# Altium PCB PCB1.PcbDoc
Units mm, origin at the board's own origin, x right, y up, seen from the top; angles counter-clockwise.
Board outline 96.9 x 99.19 mm, 2 copper layers (Top Layer, Bottom Layer); 35 components, 35 nets, 123 pads, 12 vias.
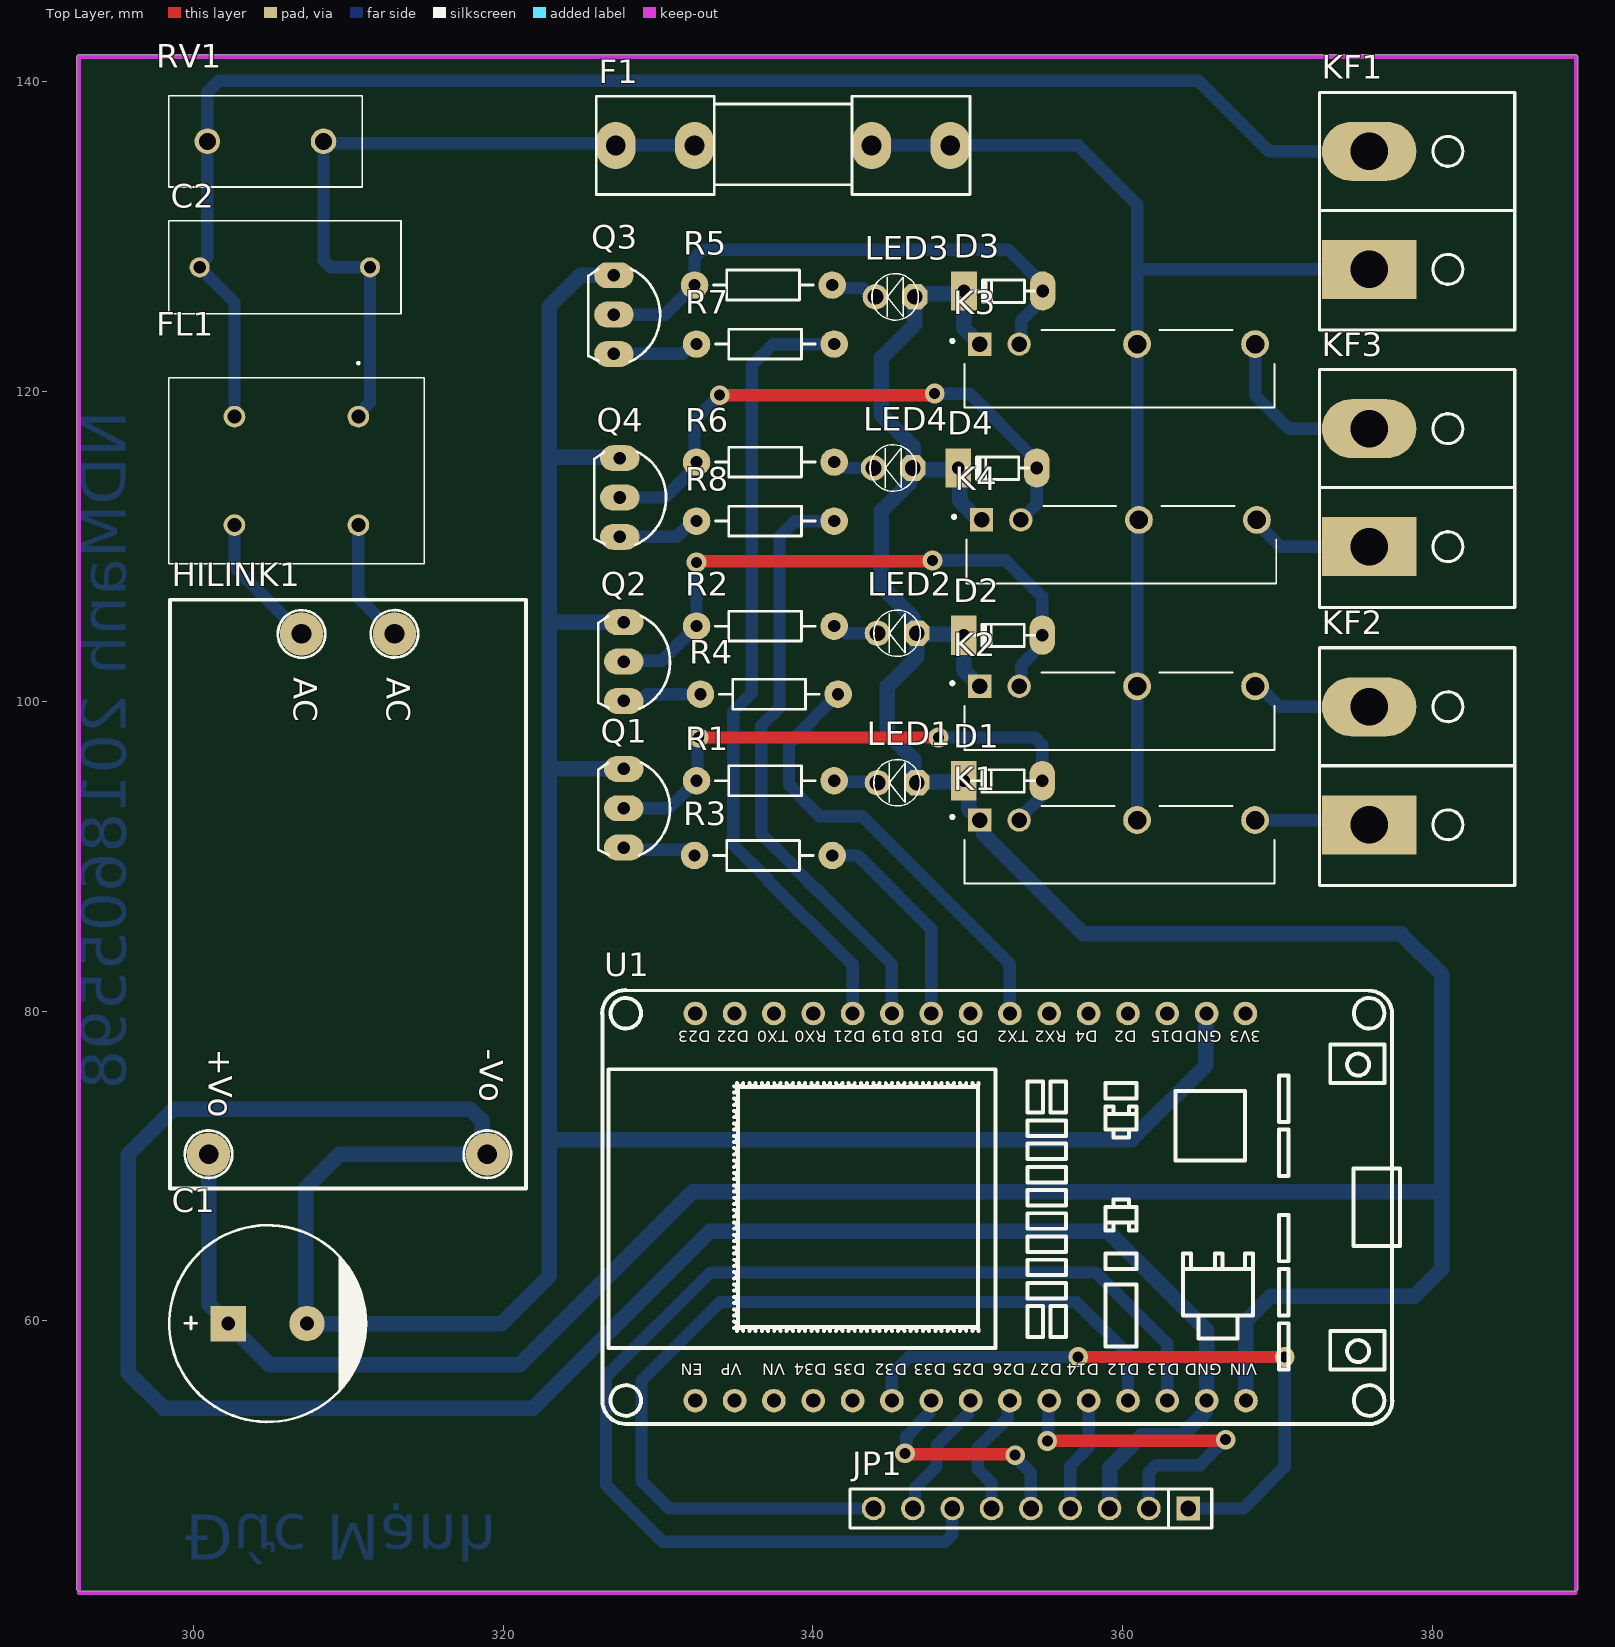
[diagram p0: Top Layer view]
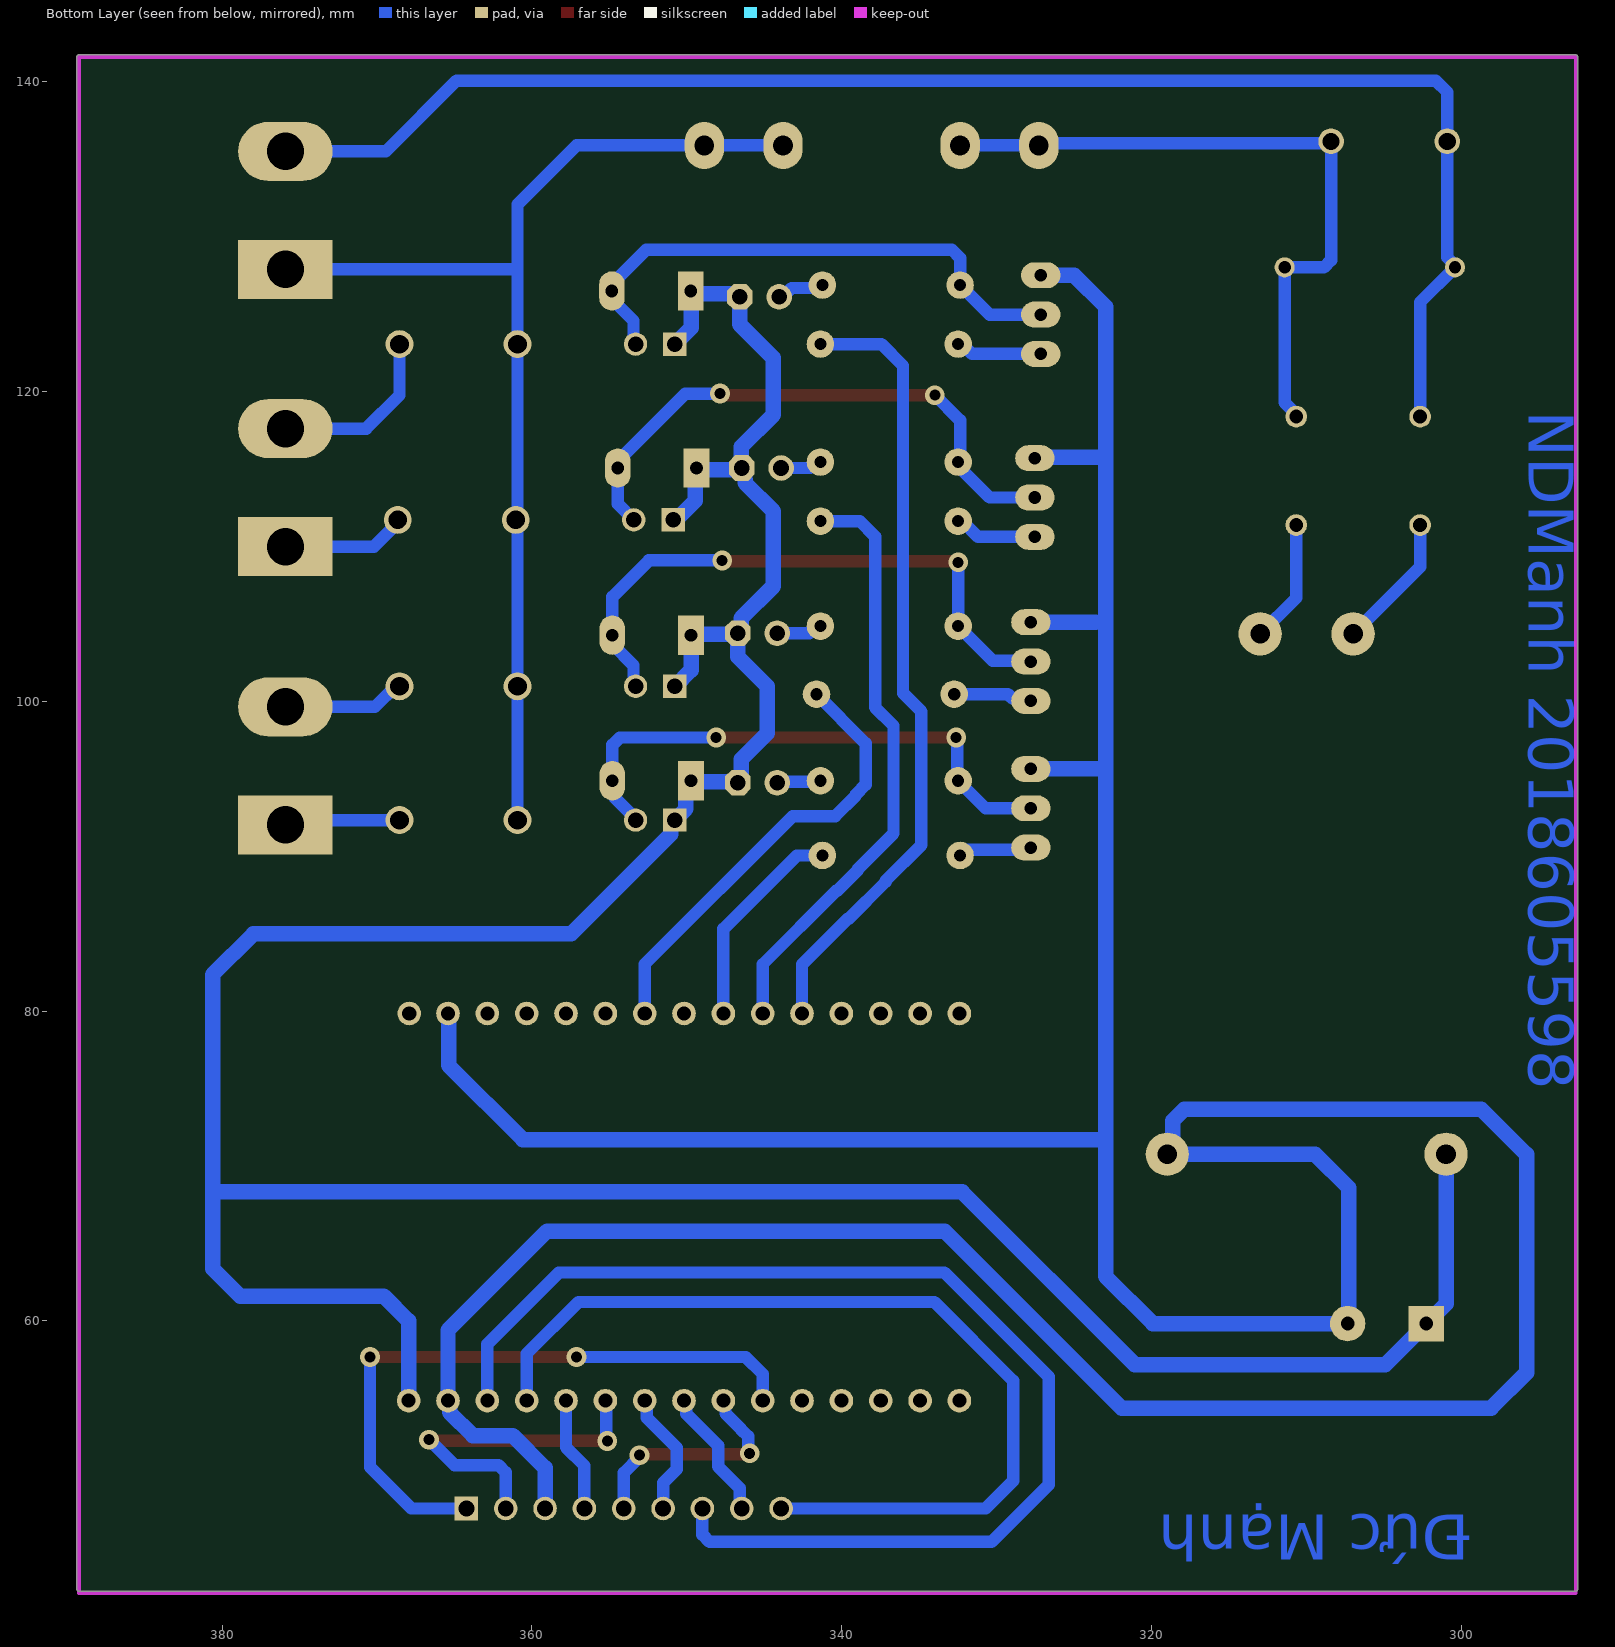
[diagram p1: Bottom Layer view, seen from below]
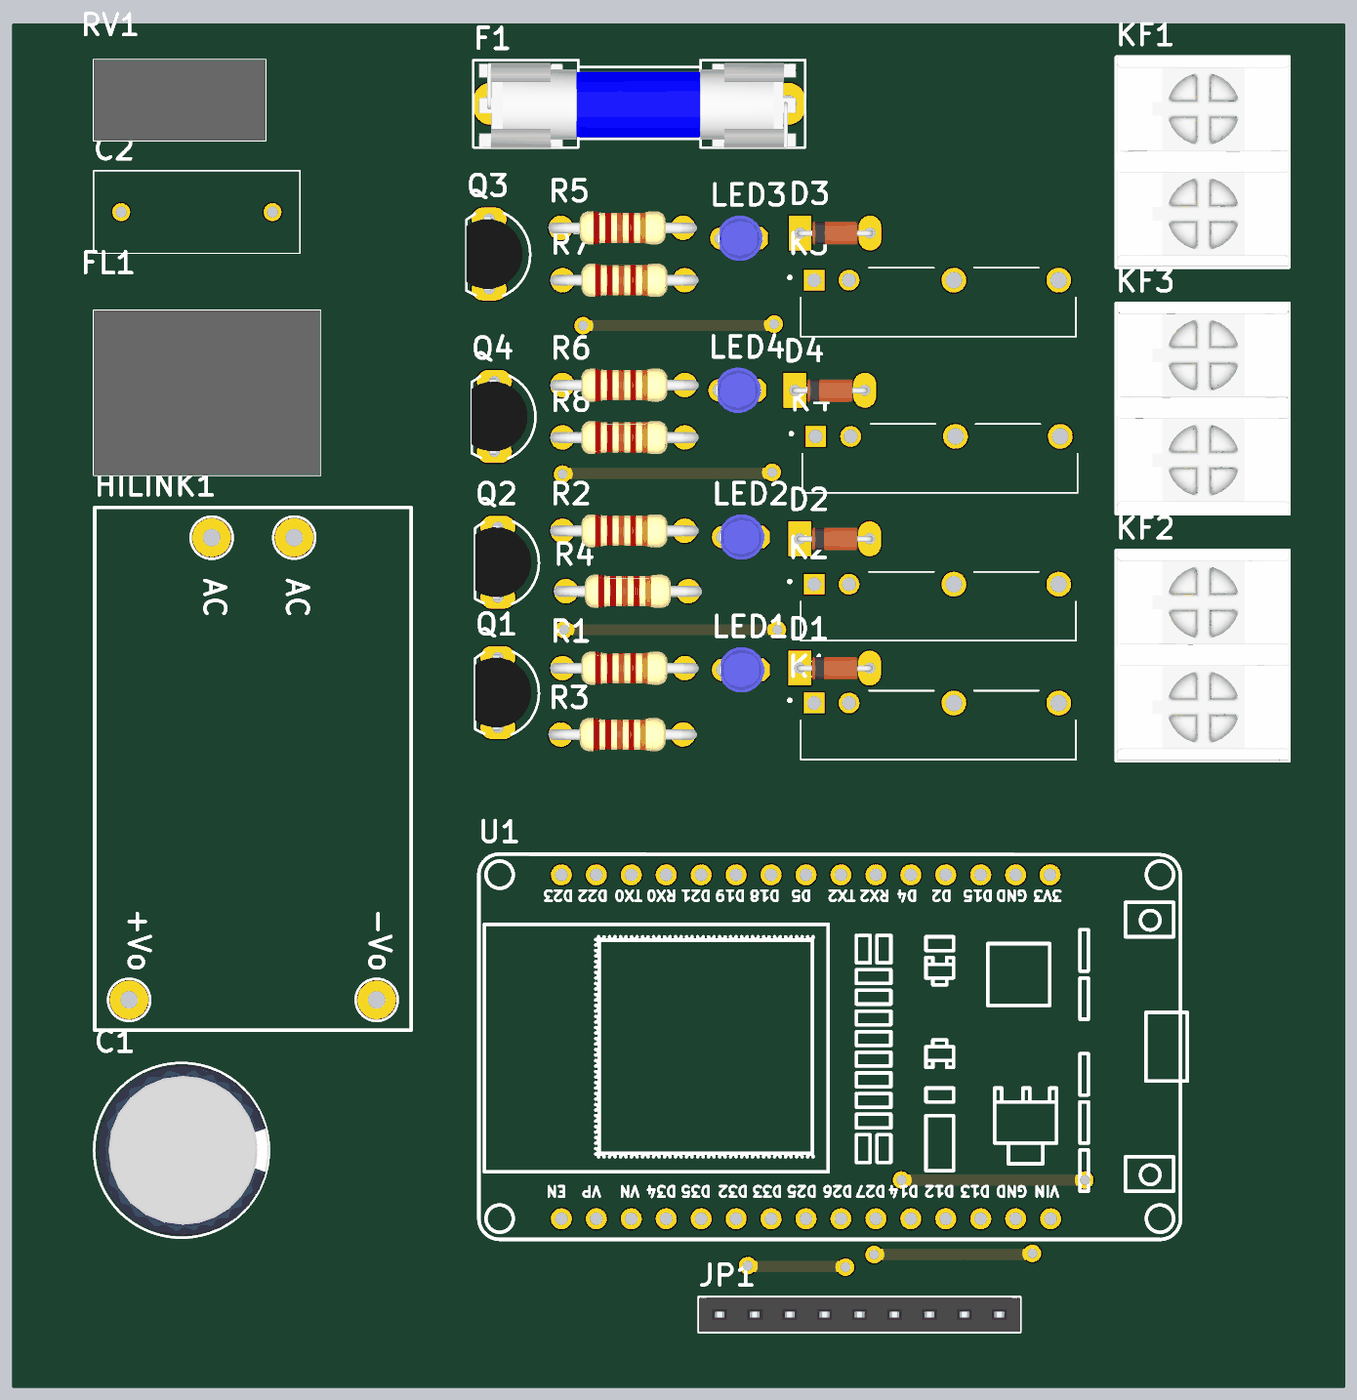
[diagram p2: 3D render of the assembled board from above, using the file's embedded part models]

## Layer stack, top to bottom
Top Solder: solder mask 0.0102, Solder Resist, Dk 3.5
Top Layer: signal copper 0.0356
Dielectric 1: dielectric 0.32, FR-4, Dk 4.8
Bottom Layer: signal copper 0.0356
Bottom Solder: solder mask 0.0102, Solder Resist, Dk 3.5

## Board outline
292.481,42.672 ccw(c292.608,42.672) 292.608,42.545 389.255,42.545 ccw(c389.255,42.672) 389.382,42.672 389.382,141.605 ccw(c389.255,141.605) 389.255,141.732 292.608,141.732 ccw(c292.608,141.605) 292.481,141.605

## Design rules (kind name [scope] priority, off if disabled: settings)
Clearance [All] p1: gap=1 ignorepadtopadclearanceinfootprint=FALSE
PolygonConnect [All] p1: connectstyle=Relief reliefconductorwidth=0.254 reliefentries=4 polygonreliefangle="90 Angle" airgapwidth=0.254
RoutingVias [All] p1: holewidth=0.711 width=1.27 viastyle="Through Hole" minholewidth=0.711 minwidth=1.27 maxholewidth=0.711 maxwidth=1.27
SolderMaskExpansion [All] p1: expansion=0.102 istentingtop=FALSE
Width GND [InNet('GND')] p1: maxlimit=1 minlimit=1 preferedwidth=1
Width VCC [InNet('VCC5')] p2: maxlimit=1 minlimit=1 preferedwidth=1
Width SIGNAL [All] p3: maxlimit=0.8 minlimit=0.8 preferedwidth=0.8
30 further rules are at their usual default settings.

## Components (designator, comment, footprint, x,y, rotation, side; value= is the part's Value field where it differs from the comment)
C1 "Cap Pol3" CP2/5 302.253,59.817 r0 top value=C?
C2 "R46KF3100JMP0K" R46KF3100JMP0K 300.404,128.016 r0 top
D1 "100v" "DIODE 0.5A" 352.271,94.869 r0 top
D2 "100v" "DIODE 0.5A" 352.271,104.267 r0 top
D3 "100v" "DIODE 0.5A" 352.298,126.492 r0 top
D4 "100v" "DIODE 0.5A" 351.917,115.062 r0 top
F1 "F1A" Fuse 338.074,135.89 r180 top value=Fuse
FL1 "UU9.8-10MH" UU9810MH 310.654,118.379 r270 top
HILINK1 "HILINK" HILINK_1W 321.481,93.853 r270 top
JP1 "JP 1x9 2.54" "JP 1x9 CT" 354.076,47.879 r180 top
K1 "HF49FD/005-1H12T" RELAY_HF49FD/005-1H12T 359.804,90.729 r0 top
K2 "HF49FD/005-1H12T" RELAY_HF49FD/005-1H12T 359.804,99.365 r0 top
K3 "HF49FD/005-1H12T" RELAY_HF49FD/005-1H12T 359.804,121.463 r0 top
K4 "HF49FD/005-1H12T" RELAY_HF49FD/005-1H12T 359.918,110.109 r0 top
KF1 "CON 2 KF7.62" "CON 2 KF7.62" 375.92,127.94 r90 top
KF2 "CON 2 KF7.62" "CON 2 KF7.62" 375.92,92.075 r90 top
KF3 "CON 2 KF7.62" "CON 2 KF7.62" 375.92,110.033 r90 top
LED1 "LED 3mm" LED-3MM-BLUE 345.313,94.742 r180 top
LED2 "LED 3mm" LED-3MM-BLUE 345.313,104.394 r180 top
LED3 "LED 3mm" LED-3MM-BLUE 345.186,126.111 r180 top
LED4 "LED 3mm" LED-3MM-BLUE 345.059,115.062 r180 top
Q1 "C1815" C1815_cam 327.787,93.091 r270 top
Q2 "C1815" C1815_cam 327.787,102.564 r270 top
Q3 "C1815" C1815_cam 327.152,124.968 r270 top
Q4 "C1815" C1815_cam 327.533,113.157 r270 top
R1 "510R" R1/4W 341.376,94.869 r180 top value="R1/4W - 1K"
R2 "510R" R1/4W 341.376,104.85 r180 top value="R1/4W - 1K"
R3 "510R" R1/4W 341.249,90.043 r180 top value="R1/4W - 1K"
R4 "510R" R1/4W 341.63,100.457 r180 top value="R1/4W - 1K"
R5 "510R" R1/4W 341.249,126.873 r180 top value="R1/4W - 1K"
R6 "510R" R1/4W 341.376,115.443 r180 top value="R1/4W - 1K"
R7 "510R" R1/4W 341.376,123.063 r180 top value="R1/4W - 1K"
R8 "510R" R1/4W 341.376,111.633 r180 top value="R1/4W - 1K"
RV1 "10D561K" 10D561K 300.904,136.154 r0 top
U1 "ESP32_MODULE copy" ESP32-WIFIMODULE-FOOTPRINT 351.917,69.469 r90 top

## Footprints (in the part's own frame and the unit in brackets; to place one, negate y for a bottom-side part, rotate by r counter-clockwise, add the part's x,y. Pads: shape width x height; smd on the part's side, far side on the other; paste and mask are expansions set on the pad)
10D561K [mm]
  round 1.65 hole 1.1: 1(0,0) 2(7.5,0)
  silkscreen extent -2.5,-2.95 10,2.95, body extent -2.5,-2.95 10,2.95, height 15.6
C1815_cam [mil]
  oval 66x100 hole 32: 1(-100,0) 2(0,0) 3(100,0)
  silkscreen extent -117,-65 120,118, body extent -109,-66 109,95, height 245
"CON 2 KF7.62" [mil]
  rect 150x240 hole 95: 1(-2,0)
  oval 150x240 hole 95: 2(298,0)
  silkscreen extent -157,-370 448,126, body extent -152,-370 448,122, height 493
CP2/5 [mil]
  rect 90x90 hole 35: 1(0,0)
  round 90 hole 35: 2(200,0)
  silkscreen extent -150,-250 350,250, body extent -142,-246 350,246, height 984
"DIODE 0.5A" [mil] "Diode muoi, xung"
  oval 65x100 hole 32: 1(100,0)
  rect 65x100 hole 32: 2(-100,0)
  silkscreen extent -80,-30 80,28, body extent -108,-33 108,32, height 61
ESP32-WIFIMODULE-FOOTPRINT [mil]
  round 60 hole 36: 1(-575.9,768.25) 2(-575.9,668.25) 3(-575.9,568.25) 4(-575.9,468.25) 5(-575.9,368.25) 6(-575.9,268.25) 7(-575.9,168.25) 8(-575.9,68.25) 9(-575.9,-31.75) 10(-575.9,-131.75) 11(-575.9,-231.75) 12(-575.9,-331.75) 13(-575.9,-431.75) 14(-575.9,-531.75) 15(-575.9,-631.75) 16(408.35,-630.18) 17(408.35,-531.75) 18(408.35,-431.75) 19(408.35,-331.75) 20(408.35,-231.75) 21(408.35,-131.75) 22(408.35,-31.75) 23(408.35,68.25) 24(408.35,168.25) 25(408.35,268.25) 26(408.35,368.25) 27(408.35,468.25) 28(408.35,568.25) 29(408.35,668.25) 30(408.35,768.25)
  silkscreen extent -635,-1023 468,1005
Fuse [mil]
  oval 100x120 hole 50: 1(-425,0) 1(-225,0) 2(225,0) 2(425,0)
  silkscreen extent -475,-125 475,125, body extent -448,-117 459,127, height 378
HILINK_1W [mil]
  round 110 hole 50: 1(-413.39,-334.65) 2(-413.39,-570.87) 3(909.45,-98.43) 4(909.45,-807.09)
  silkscreen extent -500,-906 996,0, body extent -505,-911 1001,5
"JP 1x9 CT" [mm] "9 row, straight, gold plating"
  rect 1.52x1.52 hole 1.02: 1(-10.16,0)
  round 1.52 hole 1.02: 2(-7.62,0) 3(-5.08,0) 4(-2.54,0) 5(0,0) 6(2.54,0) 7(5.08,0) 8(7.62,0) 9(10.16,0)
  silkscreen extent -11.68,-1.27 11.68,1.27, body extent -11.68,-1.25 11.68,1.25, height 8.51
LED-3MM-BLUE [mil]
  oct 65x65 hole 40: 1(-55,0)
  round 65 hole 40: 2(45,0)
  silkscreen extent -64,-59 54,59, body extent -72,-65 54,65, height 184
R1/4W [mil]
  round 70 hole 31: 1(0,0) 2(350,0)
  silkscreen extent 48,-38 302,38, body extent -40,-47 386,47, height 111
R46KF3100JMP0K [mm]
  round 1.3 hole 0.8: 1(0,0) 2(11,0)
  silkscreen extent -2,-3 13,3
RELAY_HF49FD/005-1H12T [mm]
  rect 1.508x1.508 hole 1: 1(-9.03,1.6)
  round 1.508 hole 1: 2(-6.49,1.6)
  round 1.8 hole 1.2: 3(1.13,1.6) 4(8.75,1.6)
  silkscreen extent -10.9,-2.5 10,2.5
UU9810MH [mm]
  round 1.4 hole 0.9: 1(0,0) 2(7,0) 3(7,-8) 4(0,-8)
  silkscreen extent -3.5,-12.25 9.5,4.25, body extent -2.5,-12.25 9.5,4.25, height 17.1

## Part data
C1: "Polarized Capacitor (Surface Mount)", LatestRevisionDate=17-Jul-2002, LatestRevisionNote="Re-released for DXP Platform.", PackageReference=C0805, Publisher="Altium Limited"
C2: "Capacitor", Manufacturer_Name=Kemet, Mouser Part Number=80-R46KF3100JMP0K, Datasheet Link=https://api.kemet.com/component-edge/download/specsheet/R46KF3100JMP0K.pdf, Height=12.1mm, Manufacturer_Part_Number=R46KF3100JMP0K, Mouser Price/Stock=https://www.mouser.co.uk/ProductDetail/KEMET/R46KF3100JMP0K/?qs=gt1LBUVyoHk5JqGpZKIGRw%3D%3D
D1 D2 D3 D4: library part "Diode 1N4148", "Cắm", Chung_Loai=Cắm, Don_Vi=Con, Ma_Hang=MH001065, Ten_Linh_Kien="Diode 1N4148 DO35 450mA 100V ( 1N4148 DIP)"
F1: library part Fuse, "Fuse", Designed by=VanDungEvn
FL1: "Filter", Manufacturer_Name="Guangdong Fenghua Advanced Tech", Datasheet Link=https://datasheet.lcsc.com/szlcsc/1811111206_Guangdong-Fenghua-Advanced-Tech-UU9-8-10mH_C148474.pdf, Height=17mm, Manufacturer_Part_Number=UU9.8-10MH
JP1: library part "JP 1x9 2.54 Cai Thang", "Cắm", Chung_Loai=Cắm, Don_Vi=Con, Ma_Hang=MH004006, Ten_Linh_Kien="Jump Đơn Cái 2.54MM 1x20P Thẳng"
K1 K2 K3 K4: "Relay: electromagnetic; SPST-NO; Ucoil: 5VDC; 5A/250VAC; 5A/30VDC", Package=None, Availability=Unavailable, MF=Hongfa, MP=HF49FD/005-1H12T, Price=None, SnapEDA_Link=https://www.snapeda.com/parts/HF49FD/005-1H12T/Hongfa/view-part/2753221/?ref=snap
KF1 KF2 KF3: "Cắm", Chung_Loai=Cắm, Don_Vi=Con, Ma_Hang=MH002053, Ten_Linh_Kien="CON 2 KF7.62-2P 7.62MM (Đen Thẳng)"
LED1 LED2 LED3 LED4: library part "LED 3mm Xanh Duong", "Cắm", Chung_Loai=Cắm, Don_Vi=Con, Ma_Hang=MH009003, Ten_Linh_Kien="LED 3MM Xanh Dương SS (1000c)"
Q1 Q2 Q3 Q4: "NPN 600mW, ECB"
R1 R2 R3 R4 R5 R6 R7 R8: library part R1/4W, "Resistor 1/4W"
RV1: "Varistor", Arrow Part Number=MOV-10D561K, Manufacturer_Name=Bourns, Mouser Part Number=652-MOV-10D561K, Arrow Price/Stock=https://www.arrow.com/en/products/mov-10d561k/bourns, Datasheet Link=https://www.bourns.com/docs/Product-Datasheets/MOV10D.pdf, Height=15.5mm, Manufacturer_Part_Number=MOV-10D561K, Mouser Price/Stock=https://www.mouser.co.uk/ProductDetail/Bourns/MOV-10D561K?qs=lgttKnAd%252B2ArrqGQgWwr6w%3D%3D

## Via types
v1: diameter 1.27, hole 0.711, Top Layer to Bottom Layer, 12 vias

## Nets (pads, with @x,y where several pads share a name; then routed paths per layer and width w, separated by ;. In a path a pad name is that pad's centre, name@x,y a point inside that pad or via, vN(x,y) a via of type N, cw(c..) or ccw(c..) an arc to the next point about the centre after c; other vN are vias at no path point)
0V~F1: FL1.3 HILINK1.2 | length 8.8
  Bottom Layer w0.8: FL1.3 302.654,108.68 HILINK1.2
220V~F: C2.2 F1.2 FL1.1 RV1.2 | length 44.9
  Bottom Layer w0.8: FL1.1 310.654,118.541 311.404,119.291 C2.2 308.873,128.016 308.404,128.485 RV1.2 308.536,136.022 327.147,136.022 327.279,135.89 F1.2@332.359,135.89
220V~F1: FL1.2 HILINK1.1 | length 8
  Bottom Layer w0.8: FL1.2 310.654,106.68 HILINK1.1
GND: C1.2 HILINK1.3 JP1.3 Q1.1 Q2.1 Q3.1 Q4.1 U1.14 U1.17 | length 302.6
  Bottom Layer w1: 323.596,105.104 Q2.1 ; Q3.1@327.658,127.506 324.991,127.506 322.966,125.481 322.966,115.751 ; Q4.1@327.733,115.751 322.966,115.751 ; Q1.1 323.215,95.631 322.966,95.88 ; JP1.3 359.156,50.494 361.241,52.579 363.82,52.579 365.323,54.082 365.323,54.741 U1.14 365.423,59.392 359.029,65.786 333.355,65.786 321.925,54.356 315.341,54.356 298.069,54.356 295.783,56.642 295.783,70.739 298.694,73.65 317.891,73.65 318.638,72.903 318.638,71.096 HILINK1.3 309.437,70.753 307.257,68.573 307.257,59.892 C1.2 319.913,59.817 322.966,62.87 322.966,71.379 ; U1.17 365.379,79.797 365.379,76.487 360.584,71.693 323.28,71.693 322.966,71.379 ; 322.966,71.379 322.966,95.88 ; 322.966,95.88 322.966,115.751
L: F1.1 K1.3 K2.3 K3.3 K4.3 KF1.1 | length 73.5
  Bottom Layer w0.8: F1.1@343.789,135.89 348.869,135.89 357.124,135.89 360.934,132.08 360.934,127.889 ; K1.3 K2.3 360.934,111.633 360.934,127.889 ; KF1.1 360.934,127.889
L1: K2.4 KF2.2 | length 7.9
  Bottom Layer w0.8: K2.4 368.825,100.965 370.145,99.644 KF2.2
L2: K1.4 KF2.1 | length 7.5
  Bottom Layer w0.8: K1.4 375.615,92.329 KF2.1
L3: K4.4 KF3.1 | length 8
  Bottom Layer w0.8: K4.4@368.554,111.633 370.205,109.982 KF3.1
L4: K3.4 KF3.2 | length 11.6
  Bottom Layer w0.8: K3.4 368.554,119.761 370.713,117.602 KF3.2
LED_1: JP1.6 U1.9 | length 8.2
  Bottom Layer w0.8: JP1.6 351.536,49.53 350.647,50.419 350.647,51.788 352.585,53.726 352.585,54.702 U1.9
LED_2: JP1.8 U1.8 | length 8.5
  Bottom Layer w0.8: JP1.8 346.594,48.017 346.594,49.203 347.98,50.589 347.98,51.943 350.045,54.008 350.045,54.702 U1.8
LED_3: JP1.5 U1.7 | length 15.1
  Top Layer w0.8: v1(345.945,51.435) 346.001,51.379 353.002,51.379 v1(353.059,51.322)
  Bottom Layer w0.8: v1(345.945,51.435) 346.035,51.525 346.035,52.532 346.525,53.023 346.525,53.034 347.505,54.014 347.505,54.702 U1.7 ; v1(353.059,51.322) 353.059,51.195 354.076,50.178 JP1.5
LED_4: JP1.1 U1.6 | length 42
  Top Layer w0.8: v1(357.124,57.658) v1(370.459,57.658)
  Bottom Layer w0.8: U1.6 345.103,56.559 346.202,57.658 v1(357.124,57.658) ; JP1.1 367.792,47.879 370.459,50.546 v1(370.459,57.658)
N: C2.1 FL1.4 KF1.2 RV1.1 | length 99.3
  Bottom Layer w0.8: FL1.4 302.654,125.766 C2.1 300.404,128.151 300.904,128.651 RV1.1 300.904,139.333 301.649,140.078 364.871,140.078 369.44,135.509 KF1.2
NetD1_1: D1.1 K1.2 Q1.2 R1.2 | length 36.2
  Top Layer w0.8: v1(332.613,97.663) v1(348.107,97.663)
  Bottom Layer w0.8: Q1.2 330.708,93.091 R1.2 332.549,94.932 332.549,97.599 v1(332.613,97.663) ; v1(348.107,97.663) 354.33,97.663 354.811,97.182 D1.1 354.648,94.706 354.648,93.758 353.314,92.424 K1.2
NetD2_1: D2.1 K2.2 Q2.2 R2.2 | length 39.5
  Top Layer w0.8: v1(332.486,108.966) 332.549,109.029 347.662,109.029 v1(347.726,109.093)
  Bottom Layer w0.8: Q2.2 327.844,102.621 330.257,102.621 R2.2 v1(332.486,108.966) ; v1(347.726,109.093) 352.455,109.093 354.811,106.737 354.811,103.681 353.449,102.32 353.449,101.1 K2.2
NetD3_1: D3.1 K3.2 Q3.2 R5.2 | length 35.9
  Bottom Layer w0.8: Q3.2 330.454,124.968 R5.2 332.359,128.623 332.898,129.162 352.612,129.162 354.838,126.936 D3.1 354.838,125.96 353.449,124.572 353.449,123.198 K3.2
NetD4_1: D4.1 K4.2 Q4.2 R6.2 | length 37.5
  Top Layer w0.8: v1(333.985,119.761) 347.472,119.761 347.496,119.786 347.776,119.786 v1(347.866,119.875)
  Bottom Layer w0.8: Q4.2 330.454,113.157 332.359,115.062 332.359,118.135 v1(333.985,119.761) ; v1(347.866,119.875) 347.878,119.863 350.101,119.863 354.457,115.506 354.457,112.738 K4.2
NetLED1_2: LED1.2 R1.1 | length 2.8
  Bottom Layer w0.8: R1.1 341.435,94.81 344.102,94.81 LED1.2
NetLED2_2: LED2.2 R2.1 | length 3
  Bottom Layer w0.8: R2.1 341.641,104.85 342.097,104.394 LED2.2
NetLED3_2: LED3.2 R5.1 | length 3.1
  Bottom Layer w0.8: R5.1 341.436,126.686 343.238,126.686 343.813,126.111 LED3.2
NetLED4_2: LED4.2 R6.1 | length 2.7
  Bottom Layer w0.8: R6.1 341.641,115.443 342.022,115.062 LED4.2
NetQ1_3: Q1.3 R3.2 | length 4.8
  Bottom Layer w0.8: Q1.3 327.914,90.424 332.359,90.424 R3.2@332.486,90.297
NetQ2_3: Q2.3 R4.2 | length 5.1
  Bottom Layer w0.8: Q2.3 327.955,100.192 328.992,100.192 329.126,100.326 329.146,100.326 329.277,100.457 R4.2
NetQ3_3: Q3.3 R7.2 | length 5.6
  Bottom Layer w0.8: Q3.3 331.586,122.428 332.221,123.063 R7.2
NetQ4_3: Q4.3 R8.2 | length 5.1
  Bottom Layer w0.8: Q4.3@327.787,110.617 331.205,110.617 332.221,111.633 R8.2
OUT_1: R4.1 U1.22 | length 29.4
  Bottom Layer w0.8: R4.1 338.455,97.282 338.455,94.615 339.087,93.983 339.087,93.921 340.422,92.586 340.995,92.586 341.001,92.58 342.324,92.58 342.327,92.583 343.16,92.583 352.723,83.019 U1.22
OUT_2: R3.1 U1.24 | length 13.8
  Bottom Layer w0.8: R3.1 342.9,90.043 347.643,85.3 U1.24
OUT_3: R8.1 U1.25 | length 38.8
  Bottom Layer w0.8: R8.1 338.836,111.633 337.842,110.639 337.842,99.607 336.655,98.42 336.655,91.468 338.96,89.163 338.96,89.095 340.301,87.754 340.369,87.754 345.103,83.019 U1.25
OUT_4: R7.1 U1.26 | length 51.5
  Bottom Layer w0.8: R7.1 337.439,123.063 336.042,121.666 336.042,100.522 334.855,99.335 334.855,90.722 337.16,88.417 337.16,88.349 339.555,85.954 339.623,85.954 342.563,83.014 U1.26
TOUCH1: JP1.7 U1.13 | length 77.3
  Bottom Layer w0.8: JP1.7 348.996,46.188 348.527,45.719 330.328,45.719 326.644,49.403 326.644,56.388 333.375,63.119 358.267,63.119 362.883,58.503 U1.13
TOUCH2: JP1.9 U1.12 | length 60.1
  Bottom Layer w0.8: JP1.9 330.714,47.879 328.93,49.663 328.93,56.128 334.016,61.214 356.997,61.214 360.343,57.868 U1.12
TOUCH3: JP1.4 U1.11 | length 7.5
  Bottom Layer w0.8: JP1.4 356.616,50.641 357.803,51.828 U1.11
TOUCH4: JP1.2 U1.10 | length 22.3
  Top Layer w0.8: v1(355.135,52.24) 355.146,52.251 366.576,52.251 v1(366.649,52.324)
  Bottom Layer w0.8: v1(355.135,52.24) 355.199,52.304 U1.10@355.199,54.777 ; JP1.2 361.696,50.21 362.165,50.679 365.004,50.679 v1(366.649,52.324)
VCC5: C1.1 D1.2 D2.2 D3.2 D4.2 HILINK1.4 K1.1 K2.1 K3.1 K4.1 LED1.1 LED2.1 LED3.1 LED4.1 U1.15 | length 231.2
  Bottom Layer w1: HILINK1.4 300.981,61.089 304.896,57.174 321.08,57.174 332.232,68.326 380.619,68.326 ; LED4.1 346.25,114.856 346.25,114.325 346.242,114.316 346.242,114.099 344.424,112.281 344.424,107.429 346.496,105.357 346.496,105.14 346.504,105.131 346.504,104.6 LED2.1 ; LED3.1 346.583,124.333 344.424,122.174 344.424,118.493 346.476,116.441 346.476,115.162 346.677,114.961 D4.2@349.123,114.961 ; LED3.1@346.647,126.047 346.9,126.301 349.604,126.301 349.731,126.428 349.731,124.106 K3.1 ; D4.2 349.469,114.97 349.469,112.938 350.444,111.963 350.634,111.963 350.774,111.823 K4.1@350.774,111.633 ; K2.1 349.731,102.008 D2.2 349.668,104.331 346.774,104.331 LED2.1 ; U1.15 367.963,59.988 369.57,61.595 378.841,61.595 380.619,63.373 380.619,68.326 ; LED2.1 346.71,102.87 344.805,100.965 344.805,97.946 346.504,96.246 346.504,94.948 LED1.1 346.774,94.805 349.668,94.805 D1.2 350.057,94.544 350.057,93.046 351.028,92.075 351.028,91.427 357.477,84.978 377.986,84.978 380.619,82.345 380.619,68.326
pads on no net: U1.1 U1.2 U1.3 U1.4 U1.5 U1.16 U1.18 U1.19 U1.20 U1.21 U1.23 U1.27 U1.28 U1.29 U1.30

## Keep-outs
Keep-Out Layer:
  lines w0.254: 292.608,42.418 389.255,42.418 389.255,141.605 292.608,141.605 292.608,42.418

## Other copper
Bottom Layer:
  text "NDManh 2018605598" at 296.616,118.745 h5 r90
  text "Đức Mạnh" at 299.466,48.436 h5 r180

## Text inside footprints (layer, text, board x,y; h text height)
HILINK1: Top Overlay "+Vo" at 300.981,77.553 h1.52 r270; Top Overlay "-Vo" at 318.481,77.553 h1.52 r270; Top Overlay "AC" at 306.481,101.553 h1.52 r270; Top Overlay "AC" at 312.481,101.553 h1.52 r270
U1: Top Overlay "VIN" at 368.704,57.216 h0.75 r180; Top Overlay "GND" at 366.404,57.216 h0.75 r180; Top Overlay "D13" at 363.704,57.216 h0.75 r180; Top Overlay "D12" at 361.104,57.216 h0.75 r180; Top Overlay "D14" at 358.503,57.216 h0.75 r180; Top Overlay "D27" at 356.103,57.216 h0.75 r180; Top Overlay "D26" at 353.704,57.216 h0.75 r180; Top Overlay "D25" at 351.103,57.216 h0.75 r180; Top Overlay "D33" at 348.604,57.216 h0.75 r180; Top Overlay "D32" at 346.103,57.216 h0.75 r180; Top Overlay "D35" at 343.403,57.216 h0.75 r180; Top Overlay "D34" at 340.904,57.216 h0.75 r180; Top Overlay "VN" at 338.204,57.216 h0.75 r180; Top Overlay "VP" at 335.403,57.216 h0.75 r180; Top Overlay "EN" at 332.904,57.216 h0.75 r180; Top Overlay "3V3" at 368.903,78.716 h0.75 r180; Top Overlay "GND" at 366.404,78.716 h0.75 r180; Top Overlay "D15" at 363.903,78.716 h0.75 r180; Top Overlay "D2" at 360.903,78.716 h0.75 r180; Top Overlay "D4" at 358.404,78.716 h0.75 r180; Top Overlay "RX2" at 356.404,78.716 h0.75 r180; Top Overlay "TX2" at 353.903,78.716 h0.75 r180; Top Overlay "D5" at 350.704,78.716 h0.75 r180; Top Overlay "D18" at 348.404,78.716 h0.75 r180; Top Overlay "D19" at 345.904,78.716 h0.75 r180; Top Overlay "D21" at 343.403,78.716 h0.75 r180; Top Overlay "RX0" at 340.904,78.716 h0.75 r180; Top Overlay "TX0" at 338.403,78.716 h0.75 r180; Top Overlay "D22" at 335.904,78.716 h0.75 r180; Top Overlay "D23" at 333.403,78.716 h0.75 r180